# EAGLE board Schematic (EAGLE 8.6.0)
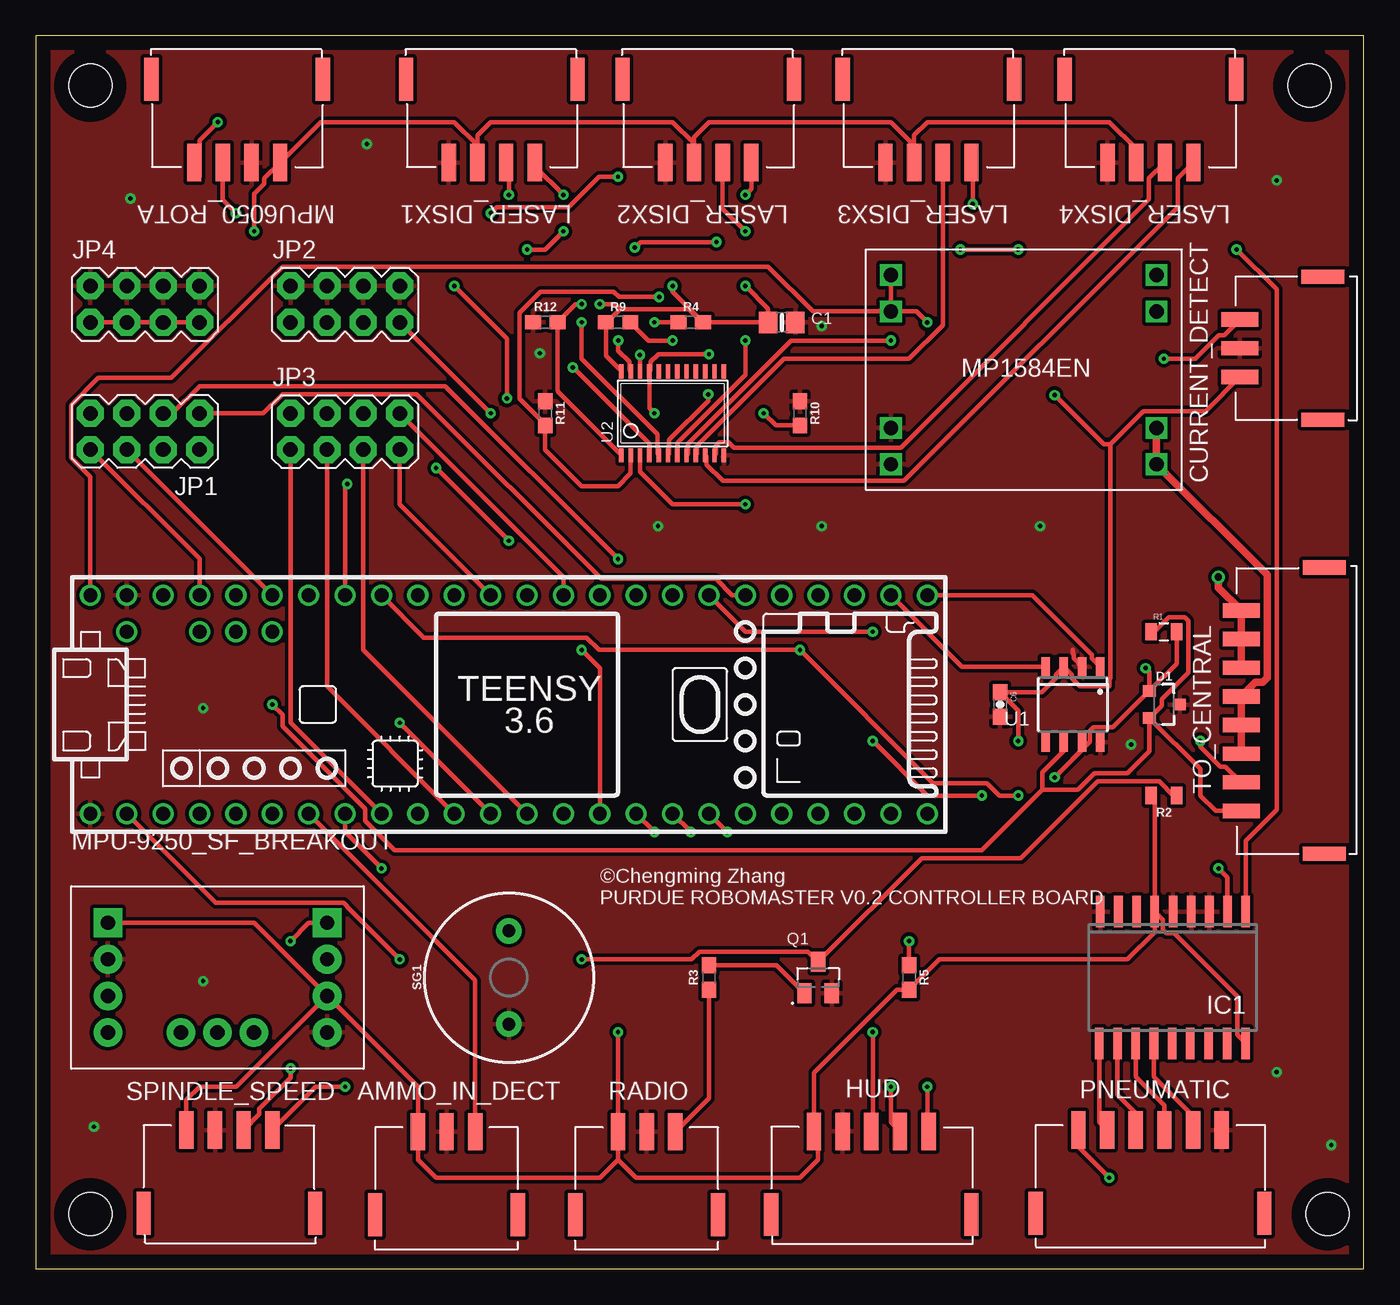
[diagram p0: board, top side]
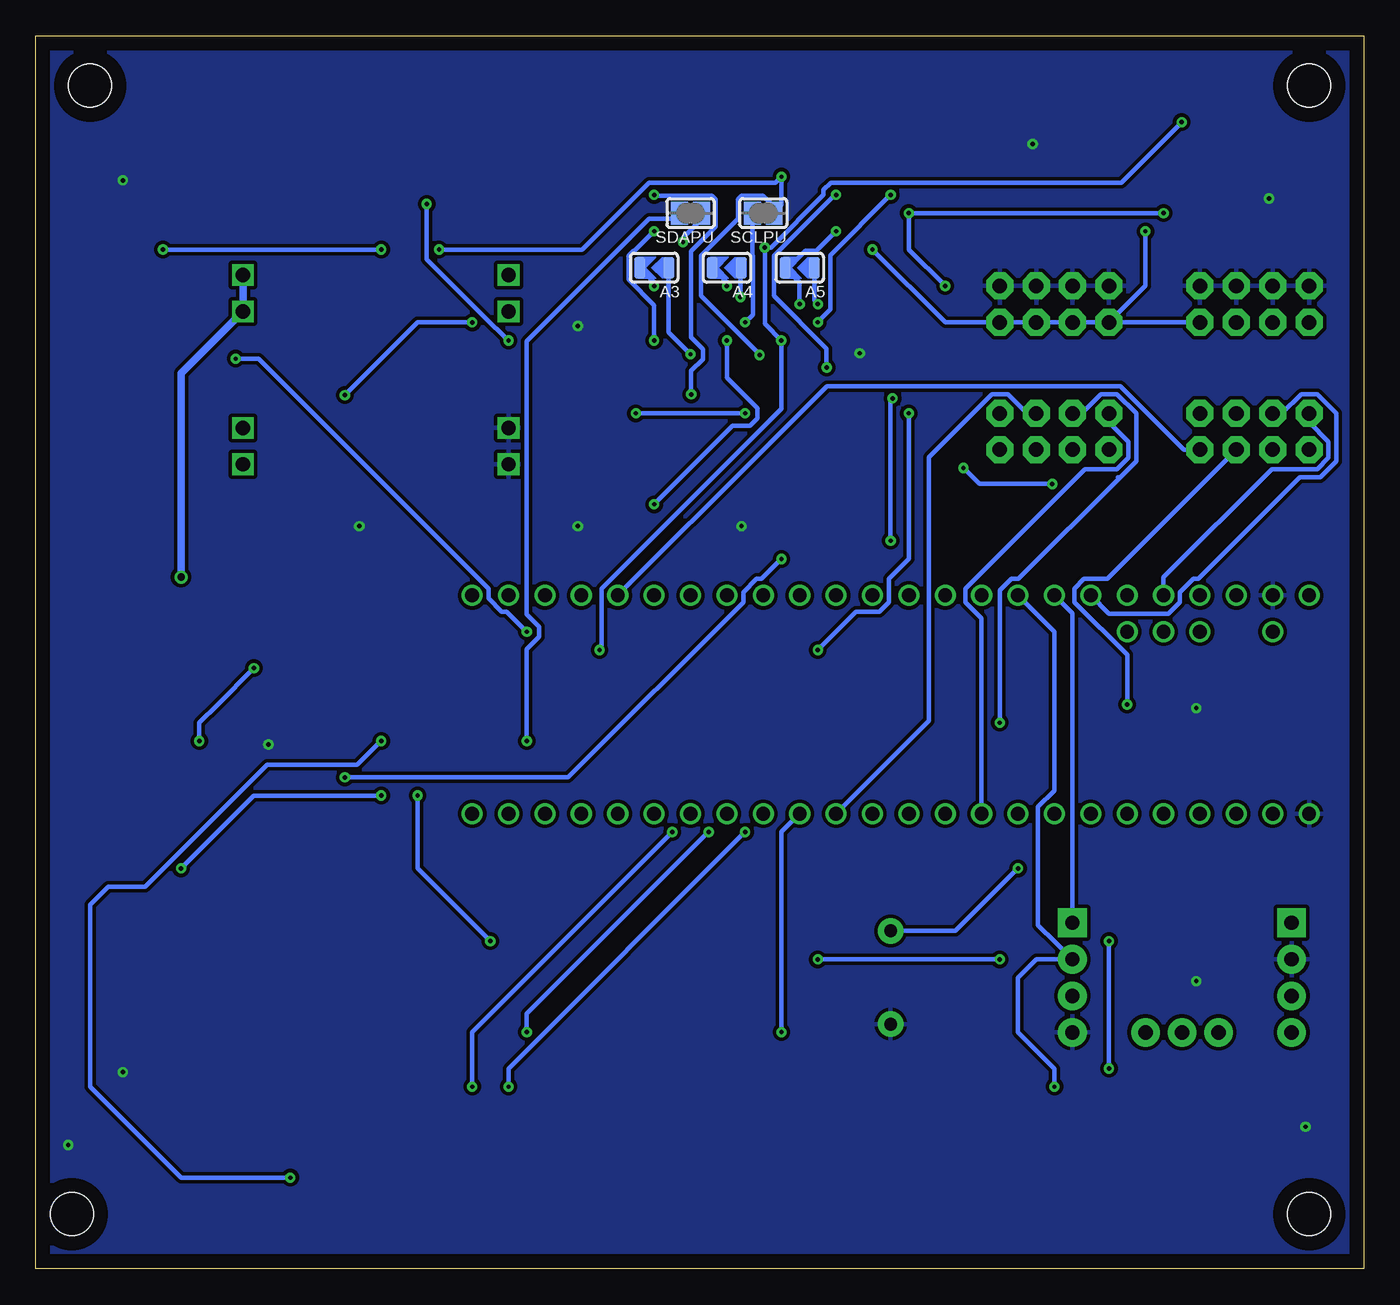
[diagram p1: board, bottom side, seen from below]

Size 92.69 x 86.03 mm. Coordinates in mm from the lower left corner, seen from the top.
Outline: 0,0 92.69,0 92.69,86.03 0,86.03 0,0
Copper layers (1*16): Top 0.035mm / dielectric 1.5mm / Bottom 0.035mm
Design rules "default *": minimum track width 6mil, minimum drill 0.3mm, track to track 6mil, track to pad 6mil, pad to pad 6mil, via to via 6mil, smd to smd 6mil, copper to edge 40mil, drill to drill 6mil, minimum pad ring 10mil, minimum via ring 8mil, stop-mask expansion 4mil, vias tented up to drill 13mil, thermal gap 10mil
Net classes: 0 default: width 0.305 mm, drill 0.305 mm, clearance 0.254 mm; 1 POWER: width 0.508 mm, drill 0.508 mm, clearance 0.254 mm
Holes 3 mm at 3.81,3.81 90.17,3.81 3.81,82.55 88.9,82.55

## Footprints (pad centres in the part's own frame; a part is rotated, then mirrored left to right if it is on the bottom)
SOLDERJUMPER_ARROW_NOPASTE = smd 0.762 x 1.524: 1 -1.016,0; 2 1.016,0
S3B-PH-SM4_TB = smd 1 x 2.6: 1 3.81,8.28; 2 5.81,8.28; 3 7.81,8.28 | smd 1 x 3: GND 0.826,2.48; GND2 10.794,2.48
0805-NO = smd 1.3 x 1.5: 1 -0.95,0; 2 0.95,0
0603-CAP = smd 1.1 x 1: 1 -0.85,0; 2 0.85,0
SOT23-3 = smd 0.8 x 0.9: 1 -0.95,-1; 2 0.95,-1; 3 0,1.1
S5B-PH-SM4_TB = smd 1 x 2.6: 1 4.92,9.33; 2 6.92,9.33; 3 8.92,9.33; 4 10.92,9.33; 5 12.92,9.33 | smd 1 x 3: GND 1.936,3.53; GND2 15.904,3.53
SO18W = smd 0.6 x 2.2: 1 -4.445,-4.6; 2 -3.175,-4.6; 3 -1.905,-4.6; 4 -0.635,-4.6; 5 0.635,-4.6; 6 1.905,-4.6; 7 3.175,-4.6; 8 4.445,-4.6; 9 5.715,-4.6; 10 5.775,4.6; 11 4.505,4.6; 12 3.235,4.6; 13 1.965,4.6; 14 0.695,4.6; 15 -0.575,4.6; 16 -1.845,4.6; 17 -3.145,4.6; 18 -4.445,4.6
2X4 = drill 1.016 pad 1.88 octagon: 1 -3.81,-1.27; 2 -3.81,1.27; 3 -1.27,-1.27; 4 -1.27,1.27; 5 1.27,-1.27; 6 1.27,1.27; 7 3.81,-1.27; 8 3.81,1.27
S4B-PH-SM4_TB = smd 1 x 2.6: 1 3.27,7.9; 2 5.27,7.9; 3 7.27,7.9; 4 9.27,7.9 | smd 1 x 3: GND 0.286,2.1; GND2 12.254,2.1
S6B-PH-SM4_TB = smd 1 x 2.6: 1 5.46,9.68; 2 7.46,9.68; 3 9.46,9.68; 4 11.46,9.68; 5 13.46,9.68; 6 15.46,9.68 | smd 1 x 3: GND 2.476,3.88; GND2 18.444,3.88
SOT95P240X120-3N = smd 1 x 1.4: 1 -0.95,-1.1; 2 0.95,-1.1; 3 0,1.1
0805@1 = smd 0.8 x 1.2: 1 -0.9,0; 2 0.9,0
0805 = smd 0.8 x 1.2: 1 -0.9,0; 2 0.9,0
0603 = smd 1.1 x 1: 1 -0.85,0; 2 0.85,0
SOLDERJUMPER_CLOSEDWIRE = smd 1.168 x 1.6: 1 -0.762,0; 2 0.762,0 | smd 0.635 x 0.203: WIRE 0,0
BUZZER-12MM = drill 0.9 pad 1.778: + 3.25,0; - -3.25,0
S8B-PH-SM4_TB = smd 1 x 2.6: 1 4,7.3; 2 6,7.3; 3 8,7.3; 4 10,7.3; 5 12,7.3; 6 14,7.3; 7 16,7.3; 8 18,7.3 | smd 1 x 3: 9 1.016,1.5; 10 20.984,1.5
SOT96-1 = smd 0.6 x 1.3: 1 -1.905,-2.65; 2 -0.635,-2.65; 3 0.635,-2.65; 4 1.905,-2.65; 5 1.905,2.65; 6 0.635,2.65; 7 -0.635,2.65; 8 -1.905,2.65
TSSOP24 = smd 0.305 x 0.991: 1 -3.575,-2.918; 2 -2.925,-2.918; 3 -2.275,-2.918; 4 -1.625,-2.918; 5 -0.975,-2.918; 6 -0.325,-2.918; 7 0.325,-2.918; 8 0.975,-2.918; 9 1.625,-2.918; 10 2.275,-2.918; 11 2.925,-2.918; 12 3.575,-2.918; 13 3.575,2.918; 14 2.925,2.918; 15 2.275,2.918; 16 1.625,2.918; 17 0.975,2.918; 18 0.325,2.918; 19 -0.325,2.918; 20 -0.975,2.918; 21 -1.625,2.918; 22 -2.275,2.918; 23 -2.925,2.918; 24 -3.575,2.918
TEENSY_3.5/3.6_BASIC = drill 0.965: 0/RX -25.4,-7.62; 1/TX -22.86,-7.62; 2 -20.32,-7.62; 3/CANTX -17.78,-7.62; 3V3 7.62,-7.62; 3V3_LO -22.86,7.62; 4/CANRX -15.24,-7.62; 5 -12.7,-7.62; 6 -10.16,-7.62; 7 -7.62,-7.62; 8 -5.08,-7.62; 9/CS -2.54,-7.62; 10/CS 0,-7.62; 11/MOSI 2.54,-7.62; 12/MISO 5.08,-7.62; 13/SCK 5.08,7.62; 14/A0 2.54,7.62; 15/A1 0,7.62; 16/A2 -2.54,7.62; 17/A3 -5.08,7.62; 18/A4/SDA -7.62,7.62; 19/A5/SCL -10.16,7.62; 20/A6 -12.7,7.62; 21/A7 -15.24,7.62; 21/DAC0 12.7,7.62; 22/A8 -17.78,7.62; 23/A9 -20.32,7.62; 24 10.16,-7.62; 25 12.7,-7.62; 26 15.24,-7.62; 27 17.78,-7.62; 28 20.32,-7.62; 29 22.86,-7.62; 30 25.4,-7.62; 31/A12 27.94,-7.62; 32/A13 30.48,-7.62; 33/A14 30.48,7.62; 34/A15 27.94,7.62; 35/A16 25.4,7.62; 36/A17 22.86,7.62; 37/A18 20.32,7.62; 38/A19 17.78,7.62; 39/A20 15.24,7.62; A10 -17.78,5.08; A11 -15.24,5.08; A22/DAC1 10.16,7.62; AGND -25.4,7.62; AREF -20.32,5.08; GND -27.94,-7.62; GND2 7.62,7.62; VIN -27.94,7.62; VUSB -25.4,5.08
MP1584_AMAZON = drill 1 square: 1 1.778,14.986; 2 1.778,12.446; 3 1.778,4.318; 4 1.778,1.778; 5 20.32,14.986; 6 20.32,12.446; 7 20.32,4.318; 8 20.32,1.778
SPARKFUN_BREAKOUT_MPU-9250 = drill 1 pad 2: AJXCL 5.1,-7.65; AUXDA 5.1,-2.55; CS 2.55,-12.75; FSYNC 5.1,-5.1; GND 5.1,2.55; INT 5.1,-12.75; SD0/AD0 0,-12.75; SDA 0,2.55; VDD 2.55,2.55 | drill 1 pad 2 square: SCL -2.55,2.55; VDDIO -2.55,-12.75

## Placement (x,y rotation side)
A3  [SOLDERJUMPER_ARROW_NOPASTE]  49.53,69.85 180 bottom
A4  [SOLDERJUMPER_ARROW_NOPASTE]  44.45,69.85 180 bottom
A5  [SOLDERJUMPER_ARROW_NOPASTE]  39.37,69.85 180 bottom
AMMO_IN_DECT  S3B-PH-SM4_TB  [S3B-PH-SM4_TB]  22.86,1.27 0 top
C1  10uF  [0805-NO]  52.07,66.04 0 top
C6  0.1uF  [0603-CAP]  67.31,39.37 270 top
CURRENT_DETECT  S3B-PH-SM4_TB  [S3B-PH-SM4_TB]  92.33,58.42 90 top
D1  PESD1CAN  [SOT23-3]  78.74,39.37 270 top
HUD  S5B-PH-SM4_TB  [S5B-PH-SM4_TB]  49.4,0.25 0 top
IC1  MCP23008/SO  [SO18W]  80.01,20.32 180 top
JP1  [2X4]  7.62,58.42 180 top
JP2  [2X4]  21.59,67.31 0 top
JP3  [2X4]  21.59,58.42 0 top
JP4  [2X4]  7.62,67.31 0 top
LASER_DISX1  S4B-PH-SM4_TB  [S4B-PH-SM4_TB]  38.1,85.09 180 top
LASER_DISX2  S4B-PH-SM4_TB  [S4B-PH-SM4_TB]  53.21,85.09 180 top
LASER_DISX3  S4B-PH-SM4_TB  [S4B-PH-SM4_TB]  68.58,85.09 180 top
LASER_DISX4  S4B-PH-SM4_TB  [S4B-PH-SM4_TB]  84.07,85.09 180 top
MPU6050_ROTA  S4B-PH-SM4_TB  [S4B-PH-SM4_TB]  20.32,85.09 180 top
PNEUMATIC  S6B-PH-SM4_TB  [S6B-PH-SM4_TB]  67.31,0 0 top
Q1  S9013  [SOT95P240X120-3N]  54.61,20.32 0 top
R1  120  [0805@1]  78.74,44.45 0 top
R2  0.3  [0805]  78.74,33.02 180 top
R3  10k  [0603]  46.99,20.32 90 top
R4  10k  [0603]  45.72,66.04 0 top
R5  10k  [0603]  60.96,20.32 270 top
R9  10k  [0603]  40.64,66.04 0 top
R10  10k  [0603]  53.34,59.69 270 top
R11  10k  [0603]  35.56,59.69 270 top
R12  10k  [0603]  35.56,66.04 0 top
RADIO  S3B-PH-SM4_TB  [S3B-PH-SM4_TB]  36.83,1.27 0 top
SCLPU  [SOLDERJUMPER_CLOSEDWIRE]  41.91,73.66 180 bottom
SDAPU  [SOLDERJUMPER_CLOSEDWIRE]  46.99,73.66 180 bottom
SG1  BUZZER-PTH  [BUZZER-12MM]  33.02,20.32 90 top
SPINDLE_SPEED  S4B-PH-SM4_TB  [S4B-PH-SM4_TB]  7.24,1.78 0 top
TO_CENTRAL  S8B-PH-SM4_TB  [S8B-PH-SM4_TB]  91.44,27.94 90 top
U1  TJA1050  [SOT96-1]  72.39,39.37 180 top
U2  TCA9548APWR  [TSSOP24]  44.45,59.69 0 top
U$1  TEENSY_3.5/3.6_BASIC  [TEENSY_3.5/3.6_BASIC]  31.75,39.37 0 top
U$2  MP1584  [MP1584_AMAZON]  80.01,71.12 180 top
U$4  SPARKFUN_BREAKOUT_MPU-9250  [SPARKFUN_BREAKOUT_MPU-9250]  17.78,21.59 270 top

## Library data of the parts
A3-A5 = microbuilder; BOM: EXCLUDE
AMMO_IN_DECT CURRENT_DETECT HUD LASER_DISX1-LASER_DISX4 MPU6050_ROTA PNEUMATIC RADIO SPINDLE_SPEED TO_CENTRAL U$4 = KevinMade
C1 SCLPU SDAPU U2 = microbuilder
C6 = SparkFun-Capacitors; PROD_ID: CAP-00810
D1 = SparkFun-DiscreteSemi; PROD_ID: DIO-12501
IC1 = adafruit
JP1-JP4 = SparkFun-Connectors
Q1 = S9013; AVAILABILITY: Unavailable; DESCRIPTION: SMD Transistors NPN 25V-500mA; MF: JCET; MP: S9013; PACKAGE: SOT-23-3 JCET; PRICE: None
R1 = SparkFun-Resistors; PROD_ID: RES-09883
R2 = SparkFun-Resistors; PROD_ID: RES-11622
R3-R5 R9-R12 = SparkFun-Resistors; PROD_ID: RES-00824
SG1 = SparkFun-Electromechanical; PROD_ID: COMP-08253; SF_SKU: COM-07950
U1 = TJA1050; AVAILABILITY: Unavailable; MF: NXP Semiconductors; MP: TJA1050; PACKAGE: None; PRICE: 0.32 USD
U$1 = Teensy356
U$2 = MP1584BUCK

## Nets
0SCL: LASER_DISX1.2 U2.5
0SDA: LASER_DISX1.1 U2.4
1SCL: LASER_DISX2.2 U2.7
1SDA: LASER_DISX2.1 U2.6
2SCL: LASER_DISX3.2 U2.9
2SDA: LASER_DISX3.1 U2.8
3SCL: LASER_DISX4.2 U2.11
3SDA: LASER_DISX4.1 U2.10
A0: A5.1 R12.2 U2.1
A1: A4.1 R11.2 U2.2
A2: A3.1 R10.2 U2.21
A6: JP1.5 U$1.20/A6
A7: JP1.6 U$1.21/A7
A8: JP1.7 U$1.22/A8
A9: JP1.8 U$1.23/A9
AMMO_INCOM: AMMO_IN_DECT.3 U$1.5
BUZZER: SG1.+ U$1.6
CAN1RX: U1.4 U$1.34/A15
CAN1TX: U1.1 U$1.33/A14
CANH: D1.1 JP1.3 R1.2 TO_CENTRAL.2 U1.7
CANL: D1.2 JP1.4 R1.1 TO_CENTRAL.1 U1.6
CS0: JP3.7 U$1.15/A1
CURRENT_SENSE: CURRENT_DETECT.3 U$1.39/A20
GND: AMMO_IN_DECT.2 C1.2 C6.2 CURRENT_DETECT.2 D1.3 HUD.2 IC1.3 IC1.4 IC1.5 IC1.9 JP2.2 JP2.4 JP2.6 JP2.8 JP4.2 JP4.4 JP4.6 JP4.8 LASER_DISX1.4 LASER_DISX2.4 LASER_DISX3.4 LASER_DISX4.4 MPU6050_ROTA.2 PNEUMATIC.6 Q1.2 R10.1 R11.1 R12.1 RADIO.2 SG1.- SPINDLE_SPEED.2 U1.2 U1.8 U2.12 U$1.AGND U$1.GND U$2.5 U$2.6 U$4.GND U$4.SD0/AD0
MISO0: JP3.6 U$1.12/MISO
MOSI0: JP3.5 U$1.11/MOSI
N$2: Q1.1 R3.2
N$3: R4.1 SCLPU.2
N$4: R5.1 SDAPU.2
N$5: R9.2 U2.3
PNEU_1: IC1.10 PNEUMATIC.2
PNEU_2: IC1.11 PNEUMATIC.3
PNEU_3: IC1.12 PNEUMATIC.4
PNEU_4: IC1.13 PNEUMATIC.5
R1IN: R3.1 RADIO.3
R1OUT: Q1.3 R2.1 U$1.0/RX
RX2: JP3.3 U$1.9/CS
RX3: JP3.1 U$1.7
SCK0: JP3.8 U$1.13/SCK
SCL: IC1.1 MPU6050_ROTA.3 SCLPU.1 SPINDLE_SPEED.3 U2.22 U$1.19/A5/SCL U$4.SCL
SCL1: JP1.2 U$1.37/A18
SDA: IC1.2 MPU6050_ROTA.4 SDAPU.1 SPINDLE_SPEED.4 U2.23 U$1.18/A4/SDA U$4.SDA
SDA1: JP1.1 U$1.38/A19
SSD_CLK: HUD.4 U$1.24
SSD_DIN: HUD.5 U$1.26
SSD_LOAD: HUD.3 U$1.25
TX2: JP3.4 U$1.10/CS
TX3: JP3.2 U$1.8
VCC: A3.2 A4.2 A5.2 AMMO_IN_DECT.1 C1.1 HUD.1 IC1.6 IC1.18 JP2.1 JP2.3 JP2.5 JP2.7 JP4.1 JP4.3 JP4.5 JP4.7 LASER_DISX1.3 LASER_DISX2.3 LASER_DISX3.3 LASER_DISX4.3 MPU6050_ROTA.1 R2.2 R4.2 R5.2 R9.1 RADIO.1 SPINDLE_SPEED.1 U2.24 U$1.3V3 U$4.VDD U$4.VDDIO
VCC_5: C6.1 CURRENT_DETECT.1 PNEUMATIC.1 U1.3 U$1.VIN U$2.7 U$2.8
VIN_24+ [POWER]: TO_CENTRAL.3 TO_CENTRAL.4 TO_CENTRAL.5 U$2.1 U$2.2
VIN_24- [POWER]: TO_CENTRAL.6 TO_CENTRAL.7 TO_CENTRAL.8 U$2.3 U$2.4

## Tracks (layer width: path | path; a pad name or v marks a point on that pad's centre or on a via)
0SCL  (via drill 0.3)
  Top 0.305: U2.5 43.38,56.86 43.38,57.15 43.38,57.44 43.38,58.22 38.1,63.5 v38.1,66.04 | LASER_DISX1.2 33.02,77 v33.02,74.93
  Bottom 0.305: v38.1,66.04 38.1,66.09 37.24,66.95 37.24,70.71 v33.02,74.93
0SDA  (via drill 0.3)
  Top 0.305: U2.4 42.83,57.55 v37.49,62.89 | v36.83,74.93 34.83,76.93 LASER_DISX1.1
  Bottom 0.305: v37.49,62.89 37.49,64.21 41.17,67.89 41.17,70.67 36.91,74.93 v36.83,74.93
1SCL  (via drill 0.3)
  Top 0.305: U2.7 44.77,57.62 49.53,62.38 v49.53,64.77 | LASER_DISX2.2 47.94,73.98 48.26,73.66 v49.53,72.39
  Bottom 0.305: v49.53,64.77 49.53,67.23 51.33,69.03 51.33,70.67 50.98,71.02 50.9,71.02 v49.53,72.39
1SDA  (via drill 0.3)
  Top 0.305: U2.6 44.22,56.86 44.22,57.86 46.94,60.58 v46.94,61.01 | v49.53,74.93 49.94,75.34 LASER_DISX2.1
  Bottom 0.305: v46.94,61.01 46.94,62.64 46.13,63.46 46.13,64.17 46.94,64.98 46.94,70.99 45.24,72.69 45.24,74.63 45.48,74.87 49.47,74.87 v49.53,74.93
2SCL
  Top 0.305: U2.9 46.17,56.86 46.17,57.44 52.23,63.5 60.96,63.5 63.31,65.85 LASER_DISX3.2
2SDA  (via drill 0.3)
  Top 0.305: U2.8 45.52,56.86 45.52,57.58 52.71,64.77 v59.69,64.77 | v65.41,74.3 65.41,77.09 LASER_DISX3.1
  Bottom 0.305: v59.69,64.77 60.56,65.64 60.61,65.64 65.41,70.43 v65.41,74.3
3SCL
  Top 0.305: LASER_DISX4.2 77.71,76.1 77.71,74.61 60.39,57.29 48.73,57.29 48.35,57.67 47.7,57.67 47.47,57.44 47.47,56.86 U2.11
3SDA
  Top 0.305: LASER_DISX4.1 79.71,76.1 79.71,74.07 60.61,54.97 47.95,54.97 46.82,56.11 46.82,56.68 U2.10
A0  (via drill 0.3)
  Top 0.305: U2.1 36.47,61.18 36.47,61.26 36.41,61.31 R12.2 37.68,67.31 v38.1,67.31
  Bottom 0.305: v38.1,67.31 38.35,67.56 A5.1
A1  (via drill 0.3)
  Top 0.305: U2.2 41.52,55.49 40.64,54.61 38.1,54.61 35.56,57.15 R11.2 35.56,58.91 33.75,60.72 33.75,66.71 35.22,68.17 40.34,68.17 40.7,67.81 v43.51,67.81
  Bottom 0.305: v43.51,67.81 43.51,69.77 A4.1
A2  (via drill 0.3)
  Top 0.305: R10.2 51.65,58.84 v50.8,59.69 | v43.18,59.69 42.83,60.05 U2.21 42.92,62.7 42.92,63.27 43.46,63.81 v46.99,63.81
  Bottom 0.305: v50.8,59.69 v43.18,59.69 | v46.99,63.81 48.51,65.34 A3.1
A6
  Bottom 0.305: JP1.5 5.71,59.69 4.37,61.04 3.25,61.04 1.91,59.69 1.91,56.36 3.02,55.24 4.45,55.24 11.56,48.13 11.9,48.13 12.83,47.21 12.83,46.52 13.62,45.72 17.78,45.72 U$1.20/A6
A7
  Top 0.305: JP1.6 U$1.21/A7
A8
  Bottom 0.305: JP1.7 3.81,59.05 2.46,57.71 2.46,56.59 3.25,55.8 6.43,55.8 13.97,48.26 U$1.22/A8
A9
  Top 0.305: JP1.8 11.43,49.53 U$1.23/A9
AMMO_INCOM
  Top 0.305: U$1.5 30.67,20.13 AMMO_IN_DECT.3
BUZZER  (via drill 0.3)
  Top 0.305: v24.13,27.94 21.59,30.48 U$1.6
  Bottom 0.305: SG1.+ 28.5,23.57 v24.13,27.94
CAN1RX
  Top 0.305: U$1.34/A15 64.66,42.02 U1.4
CAN1TX
  Top 0.305: U1.1 73.73,42.58 73.73,42.84 69.58,46.99 U$1.33/A14
CANH  (via drill 0.3)
  Top 0.305: JP1.3 9.53,59.69 11.43,61.59 28.57,61.59 v40.64,49.53 | U1.7 73.03,36.2 v71.12,34.29 73.59,36.76 73.59,37.54 73.83,37.78 75.2,37.78 D1.1 | R1.2 79.64,42.22 D1.1 | D1.1 77.74,41.64 v77.47,41.91 | TO_CENTRAL.2 83.05,35.03 82.67,35.03 81.28,36.42 v81.28,36.83
  Bottom 0.305: v40.64,49.53 42.04,48.13 42.38,48.13 43.31,47.21 43.31,46.52 55.53,34.29 v71.12,34.29 | v77.47,41.91 80.01,39.37 81.28,38.1 v81.28,36.83
CANL  (via drill 0.3)
  Top 0.305: v16.51,39.37 17.22,38.66 17.22,37.87 22.99,32.1 22.99,31.28 25.05,29.21 66.04,29.21 70.26,33.43 | 70.26,33.43 70.26,34.65 71.75,36.15 U1.6 | 70.26,33.43 72.39,33.43 72.75,33.43 73.91,34.59 76.2,34.59 77.74,36.12 D1.2 | D1.2 78.6,39.28 78.6,39.75 80.45,41.6 80.45,45.22 80.21,45.46 79.07,45.46 78.06,44.45 R1.1 | D1.2 81.28,34.88 81.28,33.02 82.36,31.94 TO_CENTRAL.1
  Bottom 0.305: v16.51,39.37 16.51,42.83 20.19,46.52 20.19,47.46 19.52,48.13 17.91,48.13 JP1.4
CS0
  Top 0.305: JP3.7 25.4,53.34 U$1.15/A1
CURRENT_SENSE  (via drill 0.3)
  Top 0.305: U$1.39/A20 49.53,44.45 v58.42,44.45 | CURRENT_DETECT.3 82.95,65.14 82.58,65.14 80.94,63.5 v78.74,63.5
  Bottom 0.305: v58.42,44.45 59.82,45.85 60.16,45.85 61.09,46.77 61.09,47.46 77.12,63.5 v78.74,63.5
GND  (via drill 0.3)
  Top 0.305: U1.2 72.46,42.58 72.46,42.84 72.39,42.91 72.39,43.18
  other vias: 35.18,63.88 54.86,65.79 76.45,36.58 6.6,74.68 86.61,75.95 86.61,13.72 90.42,8.64 4.06,9.91 11.68,20.07 11.68,39.12 43.43,51.82 54.86,51.82 70.1,51.82 23.11,78.49
  pour Top: 0,86.36 0,0 92.71,0 92.71,86.36
  pour Bottom: 0,86.36 0,-1.27 93.98,-1.27 93.98,87.63 1.27,87.63
MISO0
  Bottom 0.305: U$1.12/MISO 30.35,38.23 30.35,56.64 25.96,61.04 24.84,61.04 23.5,59.69 JP3.6
MOSI0
  Top 0.305: JP3.5 22.86,43.18 U$1.11/MOSI
N$2
  Top 0.305: R3.2 51.71,21.17 Q1.1
N$3  (via drill 0.3)
  Top 0.305: v43.18,66.04 R4.1
  Bottom 0.305: SCLPU.2 42.67,70.69 42.65,70.67 42.65,66.57 v43.18,66.04
N$4  (via drill 0.3)
  Top 0.305: v58.42,36.83 62.23,33.02 v66.04,33.02 | v60.96,22.86 R5.1
  Bottom 0.305: SDAPU.2 48.16,73.25 49.89,73.25 58.42,64.72 58.42,45.67 57.56,44.81 57.56,44.09 58.42,43.23 v58.42,36.83 | v66.04,33.02 66.04,27.94 v60.96,22.86
N$5  (via drill 0.3)
  Top 0.305: R9.2 42.76,64.77 v44.45,64.77 | v49.53,53.34 44.45,53.34 42.17,55.62 U2.3
  Bottom 0.305: v44.45,64.77 44.45,62.18 42.32,60.05 42.32,59.33 42.82,58.83 44.04,58.83 v49.53,53.34
PNEU_1
  Top 0.305: IC1.10 74.23,10.21 PNEUMATIC.2
PNEU_2
  Top 0.305: IC1.11 75.5,12.12 76.77,10.86 PNEUMATIC.3
PNEU_3
  Top 0.305: IC1.12 76.78,13.39 78.77,11.4 PNEUMATIC.4
PNEU_4
  Top 0.305: IC1.13 78.05,13.39 80.77,10.67 PNEUMATIC.5
R1IN
  Top 0.305: RADIO.3 46.99,11.9 R3.1
R1OUT  (via drill 0.3)
  Top 0.305: v25.4,21.59 21.74,25.25 21.74,25.31 21.5,25.55 12.55,25.55 U$1.0/RX | v38.1,21.59 45.78,21.59 46.32,22.13 53.9,22.13 Q1.3 61.84,28.65 68.76,28.65 74.14,34.03 78.41,34.03 79.42,33.02 R2.1
  Bottom 0.305: v25.4,21.59 v38.1,21.59
RX2
  Top 0.305: JP3.3 20.32,40.64 U$1.9/CS
RX3
  Top 0.305: JP3.1 17.78,38.1 U$1.7
SCK0
  Top 0.305: JP3.8 36.83,48.26 U$1.13/SCK
SCL  (via drill 0.3)
  Top 0.305: U2.22 v42.17,63.75 v42.17,63.76 | MPU6050_ROTA.3 13.05,74.58 v13.97,73.66 | v31.75,73.66 32.16,74.07 37.19,74.07 39.32,76.2 v40.64,76.2 | IC1.1 84.45,29.88 86.61,32.03 86.61,68.33 v83.82,71.12 | v68.58,71.12 v64.54,71.12 | U$1.19/A5/SCL 21.59,54.61 v21.74,54.76 | v27.94,55.88 v33.02,50.8 | v32.89,60.73 32.89,64.9 v29.21,68.58 | SPINDLE_SPEED.3 15.6,10.77 15.6,11.15 17.78,13.32 v17.78,13.97 | v17.78,22.86 19.06,24.14 U$4.SCL
  Bottom 0.305: U$4.SCL 20.33,45.73 U$1.19/A5/SCL | v42.17,63.76 42.17,63.81 46.25,67.89 46.25,70.67 43.66,73.26 43.66,74.63 43.42,74.87 41.92,74.87 41.19,74.13 41.19,73.7 | 41.19,73.7 SCLPU.1 | v13.97,73.66 v31.75,73.66 31.75,71.12 v29.21,68.58 | 41.19,73.7 40.64,74.24 v40.64,76.2 41.05,75.79 49.89,75.79 54.56,71.12 v64.54,71.12 | v83.82,71.12 v68.58,71.12 | v21.74,54.76 26.82,54.76 v27.94,55.88 | v33.02,50.8 33.02,60.6 v32.89,60.73 | v17.78,13.97 v17.78,22.86
SCL1
  Bottom 0.305: JP1.2 12.55,57.15 16.99,61.59 37.47,61.59 41.91,57.15 U$1.37/A18
SDA  (via drill 0.3)
  Top 0.305: v47.51,71.64 42.19,71.64 v41.81,71.25 | U2.23 41.43,62.7 41.43,63.27 40.65,64.05 v40.65,64.77 | U$1.18/A4/SDA 27.08,44.04 38.46,44.04 39.32,43.18 v53.34,43.18 62.64,33.88 66.4,33.88 67.26,33.02 v68.58,33.02 | v12.7,80.01 11.43,78.74 11.43,76.81 | 11.43,76.2 11.43,76.81 | 11.43,76.81 MPU6050_ROTA.4 | v82.55,27.94 83.19,27.3 IC1.2 | SPINDLE_SPEED.4 19.53,12.7 v21.59,12.7
  Bottom 0.305: U$1.18/A4/SDA 21.59,44.45 21.59,33.37 22.73,32.22 22.73,23.97 21.5,22.73 21.47,22.73 U$4.SDA 22.86,21.59 24.13,20.32 24.13,16.51 21.59,13.97 v21.59,12.7 | SDAPU.1 46.27,73.62 46.27,73.19 47.51,71.94 v47.51,71.64 | v53.34,43.18 53.21,43.31 53.21,47.46 40.65,60.02 v40.65,64.77 41.81,65.92 v41.81,71.25 41.38,71.25 37.69,74.94 37.69,75.29 37.19,75.79 16.92,75.79 v12.7,80.01 | v68.58,33.02 77.47,33.02 v82.55,27.94
SDA1
  Top 0.305: JP1.1 15.88,59.69 17.22,61.04 26.59,61.04 39.5,48.13 47.46,48.13 48.61,46.99 U$1.38/A19
SSD_CLK  (via drill 0.3)
  Top 0.305: U$1.24 v43.18,30.48 | v59.69,12.7 59.69,10.22 HUD.4
  Bottom 0.305: v43.18,30.48 59.69,13.97 v59.69,12.7
SSD_DIN  (via drill 0.3)
  Top 0.305: U$1.26 v48.26,30.48 | v62.23,12.7 62.23,9.68 HUD.5
  Bottom 0.305: v48.26,30.48 62.23,16.51 v62.23,12.7
SSD_LOAD  (via drill 0.3)
  Top 0.305: U$1.25 v45.72,30.48 | v58.42,16.51 58.42,9.68 HUD.3
  Bottom 0.305: v45.72,30.48 58.42,17.78 v58.42,16.51
TX2  (via drill 0.3)
  Top 0.305: v25.4,38.1 U$1.10/CS
  Bottom 0.305: 16.99,55.24 15.88,56.36 15.88,59.69 17.22,61.04 18.34,61.04 19.68,59.69 JP3.4 | 16.99,55.24 17.14,55.24 | 16.99,55.24 24.1,48.13 24.6,48.13 25.4,47.34 v25.4,38.1
TX3
  Bottom 0.305: U$1.8 26.67,45.37 27.81,46.52 27.81,47.46 19.47,55.8 17.22,55.8 16.43,56.59 16.43,57.71 17.78,59.05 JP3.2
VCC  (via drill 0.3)
  Top 0.305: U$4.VDD 26.67,12.7 AMMO_IN_DECT.1 26.67,7.62 27.94,6.35 39.37,6.35 40.64,7.62 | U$4.VDDIO 15.23,24.14 U$4.VDD | IC1.6 78.67,24.36 78.67,23.65 78.91,23.41 79.46,23.41 83.86,19.01 83.86,16.31 IC1.18 | IC1.6 78.11,32.76 R2.2 | LASER_DISX4.3 76.8,78.14 74.93,80.01 62.23,80.01 61.31,79.09 LASER_DISX3.3 61.31,78.39 59.69,80.01 46.99,80.01 45.94,78.96 LASER_DISX2.3 45.94,78.52 44.45,80.01 31.75,80.01 30.83,79.09 LASER_DISX1.3 30.83,78.39 29.21,80.01 19.87,80.01 MPU6050_ROTA.1 15.96,76.1 15.96,75.72 15.24,75 v15.24,72.39 | JP4.7 JP4.5 JP4.3 JP4.1 | R4.2 C1.1 51.12,66.99 v49.53,68.58 | R4.2 46.49,66.04 45.59,66.95 40.77,66.95 | 40.77,66.95 39.87,66.04 R9.1 39.79,63.69 U2.24 | IC1.6 78.11,23.5 76.2,21.59 63.08,21.59 R5.2 60.11,19.47 54.32,13.68 HUD.1 54.61,9.3 54.61,7.62 53.34,6.35 41.91,6.35 40.64,7.62 | 40.77,66.95 40.41,67.31 v39.37,67.31 | R4.2 44.45,68.16 v44.45,68.58 | v34.29,71.12 35.56,71.12 v36.83,72.39 | U$1.3V3 39.37,41.91 v38.1,43.18 | v31.75,59.69 JP2.7 | U$4.VDD 13.99,12.7 11.43,12.7 10.51,11.78 SPINDLE_SPEED.1 | 40.64,7.62 RADIO.1 v40.64,16.51
  Bottom 0.305: JP4.7 JP2.1 | JP2.1 JP2.3 JP2.5 JP2.7 29.21,66.04 v34.29,71.12 | JP2.1 15.24,68.58 v15.24,72.39 | v39.37,67.31 39.37,68.83 A5.2 40.15,69.85 38.98,71.02 38.2,71.02 v36.83,72.39 | v44.45,68.58 44.45,68.83 A4.2 | v49.53,68.58 49.53,68.83 A3.2 | v31.75,59.69 31.75,49.53 33.15,48.13 33.15,46.52 33.82,45.85 35.43,45.85 v38.1,43.18 | v40.64,16.51 40.64,30.48 U$1.3V3
VCC_5  (via drill 0.3)
  Top 0.305: U$2.7 54.23,66.8 51.11,69.93 17.22,69.93 9.45,62.15 4.37,62.15 2.46,60.25 2.46,56.59 3.81,55.25 U$1.VIN | CURRENT_DETECT.1 81.65,59.83 77.31,59.83 75,57.53 | 75,57.53 75,41.2 74.93,41.13 74.93,40.64 72.88,40.64 72.32,41.2 72.32,41.46 U1.3 71.19,41.46 71.19,41.2 70.21,40.22 C6.1 68.58,38.95 v68.58,36.83 | U$2.8 U$2.7 | U$2.7 61.47,66.8 v62.23,66.04 | v71.12,60.96 74.55,57.53 75,57.53 | v74.93,6.35 72.77,8.51 PNEUMATIC.1
  Bottom 0.305: v62.23,66.04 66.04,66.04 v71.12,60.96 | v68.58,36.83 70.26,35.15 76.56,35.15 85.04,26.67 87.63,26.67 88.9,25.4 88.9,12.7 82.55,6.35 v74.93,6.35
VIN_24+
  Top 0.508: U$2.2 U$2.1 85.95,48.42 85.95,41.23 85.65,40.93 85.13,40.93 TO_CENTRAL.5 TO_CENTRAL.4 TO_CENTRAL.3
VIN_24-  (via drill 0.51)
  Top 0.508: v82.55,48.26 82.55,47.53 TO_CENTRAL.8 TO_CENTRAL.7 TO_CENTRAL.6
  Bottom 0.508: U$2.4 U$2.3 82.55,62.48 v82.55,48.26

## Text on the board
tNames: ©Chengming Zhang / PURDUE ROBOMASTER V0.2 CONTROLLER BOARD